# Altium PCB PCB1.PcbDoc
Units mm, origin at the board's own origin, x right, y up, seen from the top; angles counter-clockwise.
Board outline 45 x 45 mm, 2 copper layers (Top Layer, Bottom Layer); 38 components, 25 nets, 182 pads, 148 vias.
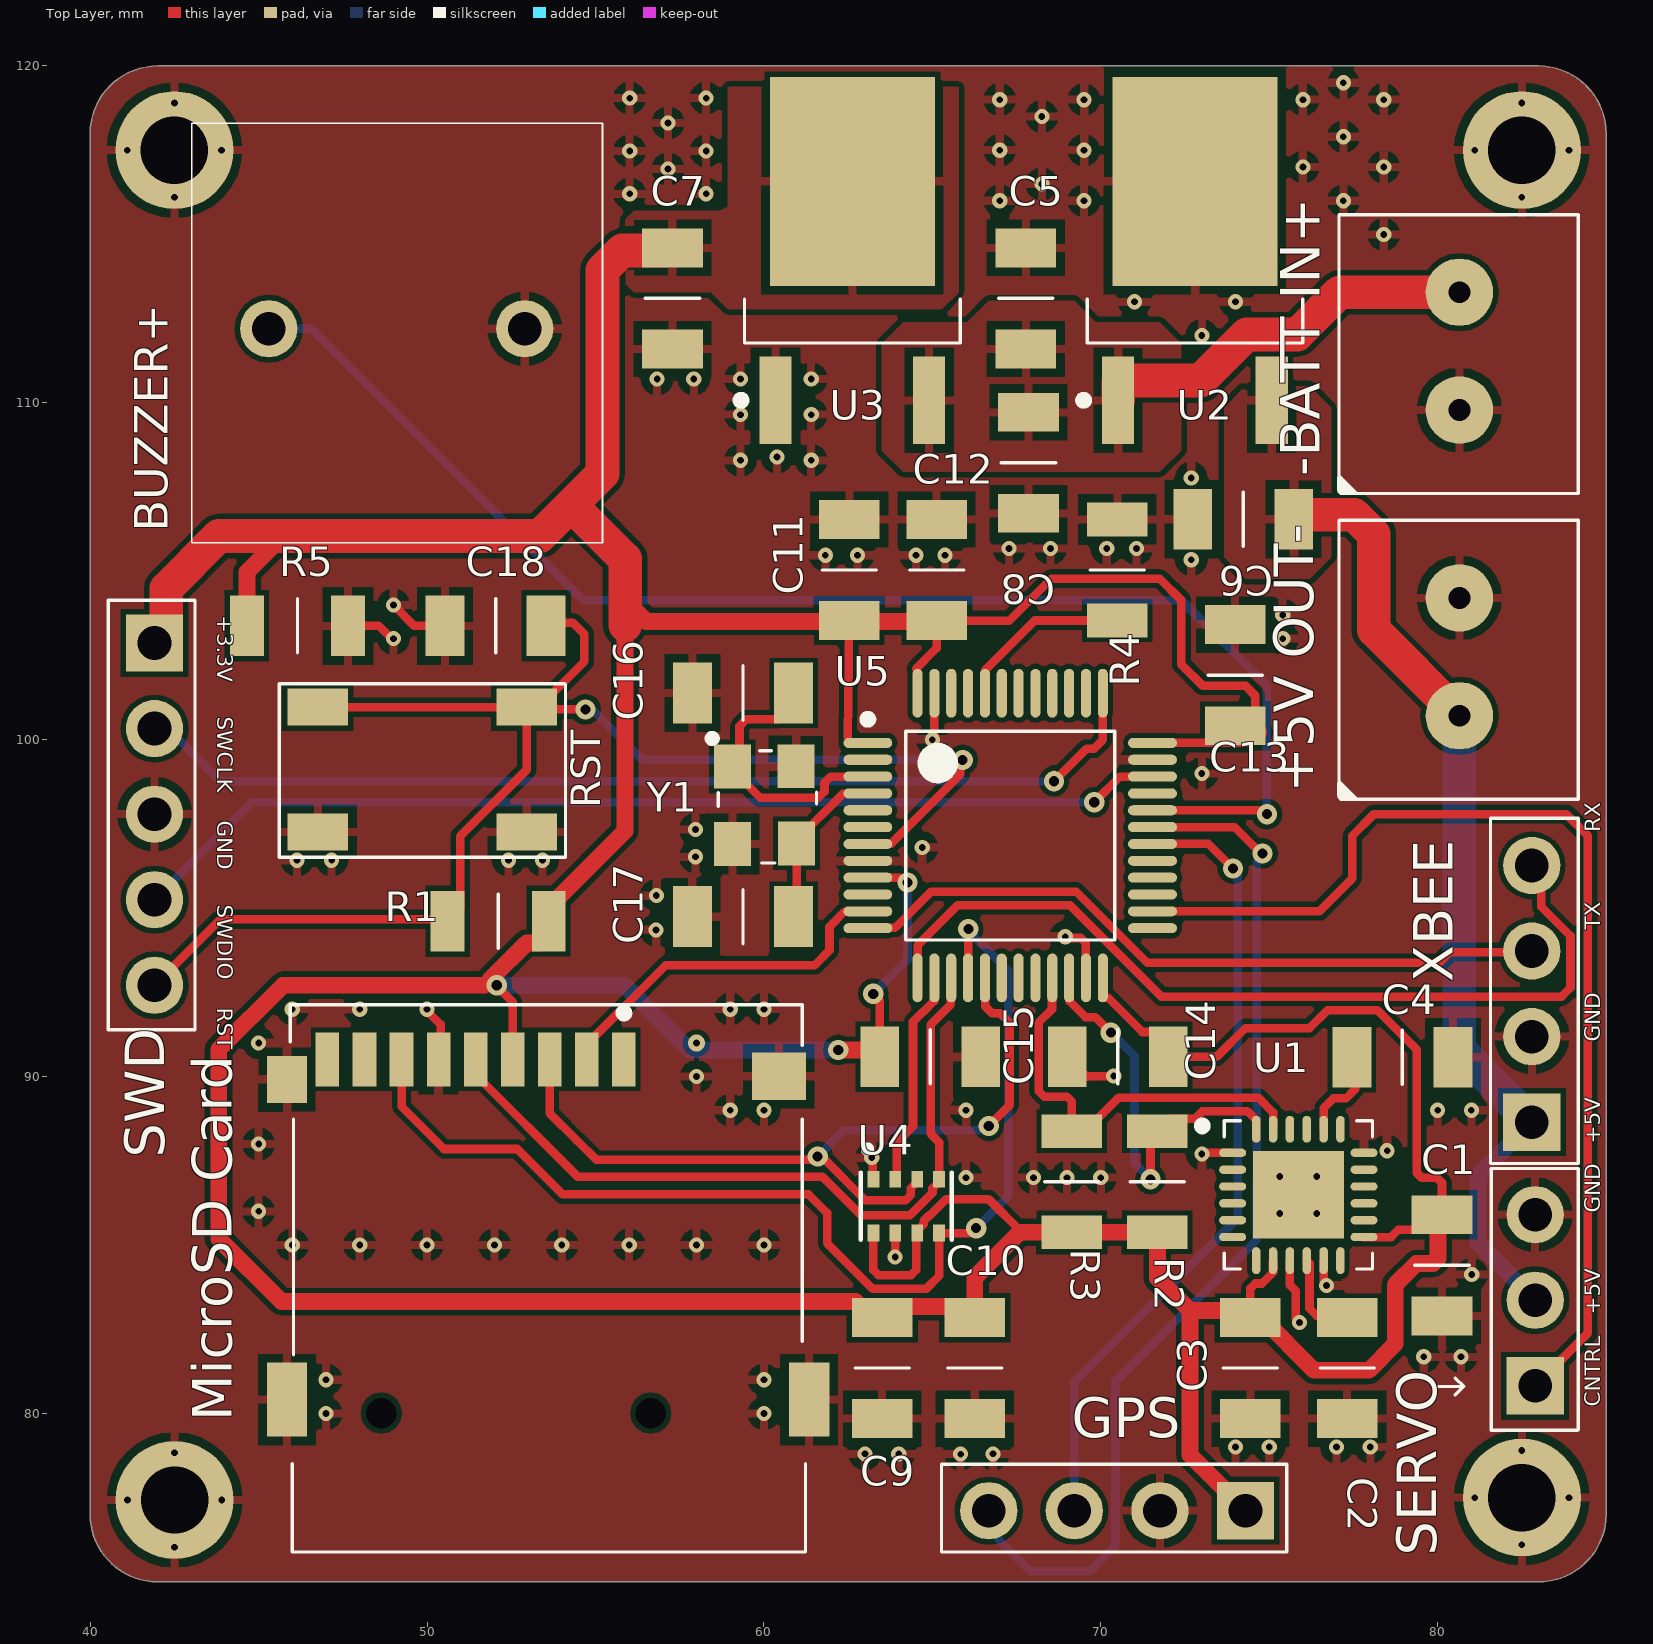
[diagram p0: Top Layer view]
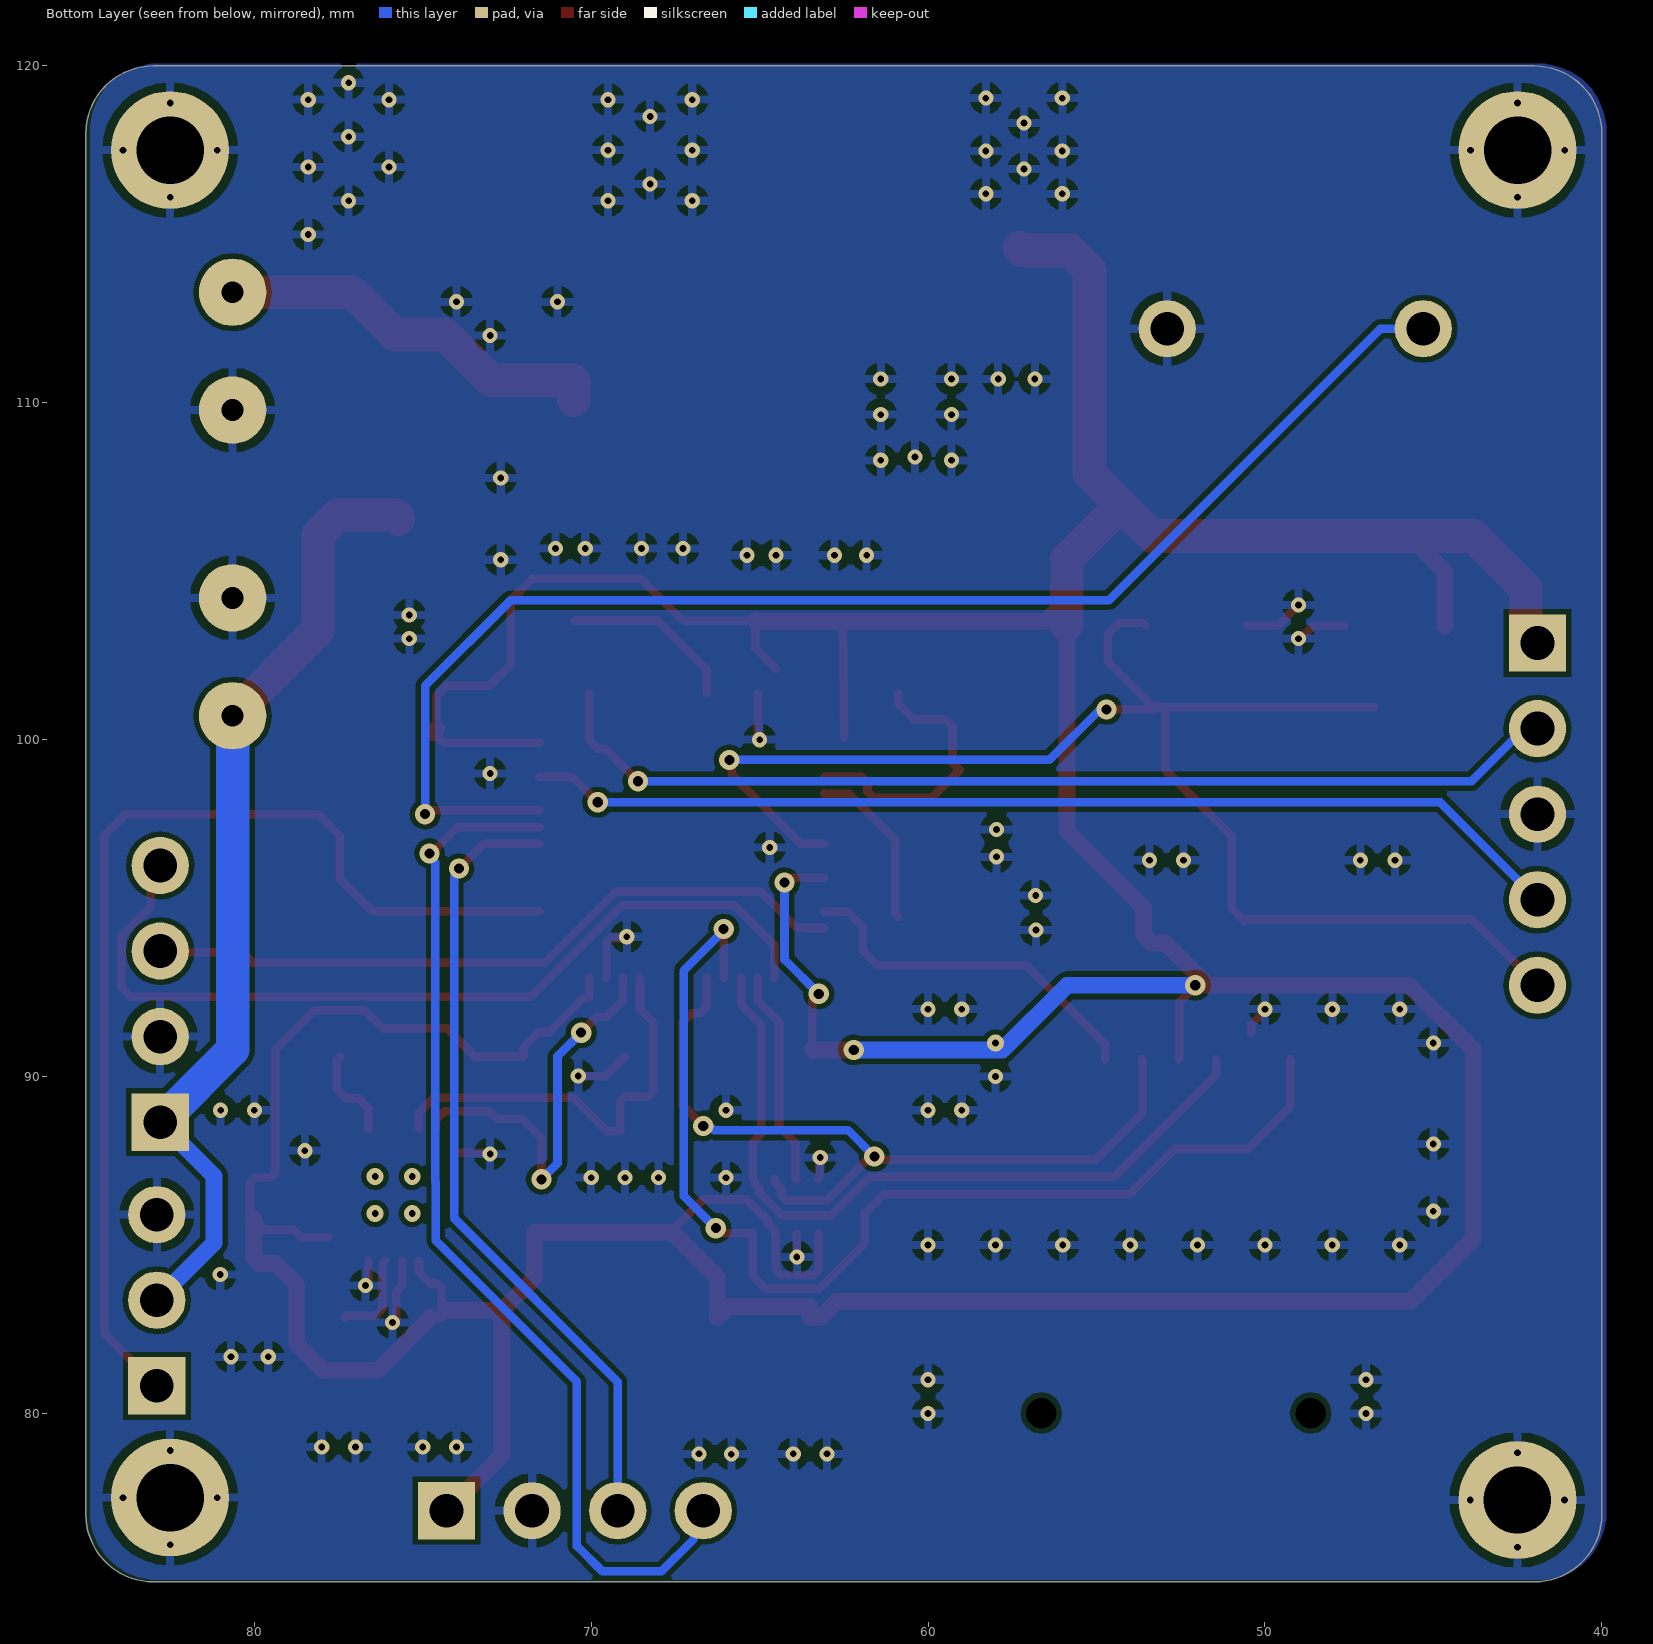
[diagram p1: Bottom Layer view, seen from below]
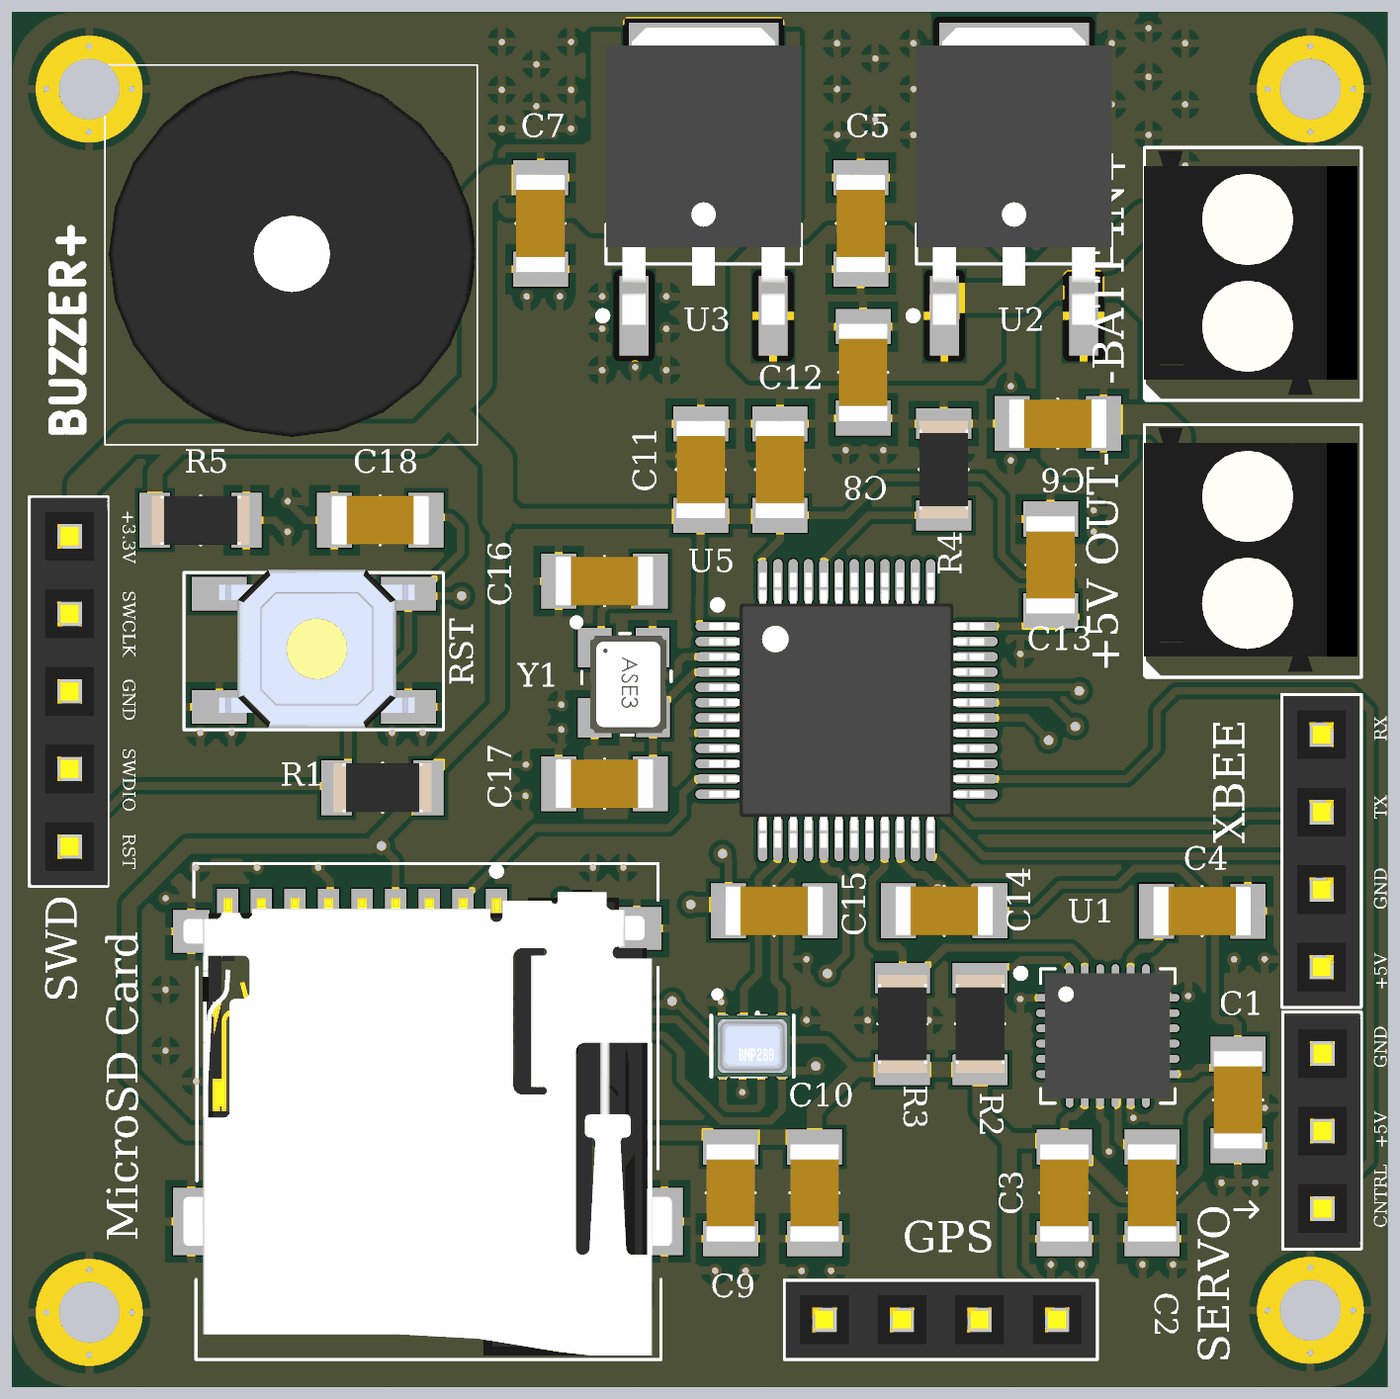
[diagram p2: 3D render of the assembled board from above, using the file's embedded part models]

## Layer stack, top to bottom
Top Solder: solder mask 0.0102, Solder Resist, Dk 3.5
Top Layer: signal copper 0.0356
Dielectric 1: dielectric 0.32, FR-4, Dk 4.8
Bottom Layer: signal copper 0.0356
Bottom Solder: solder mask 0.0102, Solder Resist, Dk 3.5

## Board outline
40,77 40,118 cw(c42,118) 42,120 83,120 cw(c83,118) 85,118 85,77 cw(c83,77) 83,75 42,75 cw(c42,77)

## Design rules (kind name [scope] priority, off if disabled: settings)
Clearance [All] p1: gap=0.152 ignorepadtopadclearanceinfootprint=FALSE except(0: Arc-Hole Track-Hole SMDPad-Hole THPad-Hole Via-Hole Fill-Hole Poly-Hole Region-Hole Text-Hole)
PolygonConnect [All] p1: connectstyle=Relief reliefconductorwidth=0.254 reliefentries=4 polygonreliefangle="90 Angle" airgapwidth=0.254
RoutingVias [All] p1: holewidth=0.3 width=0.6 viastyle="Through Hole" minholewidth=0.2 minwidth=0.45 maxholewidth=0.9 maxwidth=1.27
SolderMaskExpansion [All] p1: expansion=0.2 istentingtop=FALSE soldermaskfromhole=TRUE
Width [All] p1: maxlimit=1 minlimit=0.127 preferedwidth=0.254 minimp=50.000000 maximp=50.000000 favimp=50.000000
30 further rules are at their usual default settings.

## Components (designator, comment, footprint, x,y, rotation, side; value= is the part's Value field where it differs from the comment)
"+5V OUT-" "Klemens 1x2 3.5mm" "Klemens 1x2 - 3.5mm" 80.595,102.311 r90 top (schematic designator J1)
"-BATT IN+" "Klemens 1x2 3.5mm" "Klemens 1x2 - 3.5mm" 80.595,111.384 r90 top (schematic designator J2)
BUZZER+ "Buzzer 5v" BUZZER_5V 45.3,112.2 r0 top (schematic designator B1)
C1 "0.1 uF" C1206 79.629,83.82 r90 top
C2 "0.1 uF" C1206 77.814,81.922 r270 top
C3 "10 uF" C1206 73.942,80.772 r90 top
C4 "2.2 nF" C1206 78.379,91.074 r0 top
C5 "330 nF" C1206 67.275,112.525 r90 top
C6 "0.1 uF" C1206 74.803,106.045 r180 top
C7 "10 uF" C1206 57.785,113.675 r270 top
C8 "10 uF" C1206 68.353,108.795 r270 top
C9 "0.1 uF" C1206 63.011,80.772 r90 top
C10 "10 uF" C1206 65.759,80.772 r90 top
C11 "0.1 uF" C1206 62.034,104.462 r90 top
C12 "0.1 uF" C1206 64.626,104.462 r90 top
C13 "0.1 uF" C1206 73.49,101.342 r90 top
C14 "0.1 uF" C1206 71.081,90.086 r180 top
C15 "0.1 uF" C1206 64.361,91.086 r0 top
C16 "16 pF" C1206 58.805,101.885 r0 top
C17 "16 pF" C1206 58.805,95.25 r0 top
C18 "0.1 uF" C1206 51.459,103.878 r0 top
GPS "Header 2.54 1x4" "Header 2.54 1x4" 73.795,76.387 r180 top (schematic designator J3)
"MicroSD Card" "Micro SD Card Holder" "Micro SD Card Holder" 53.158,83.435 r0 top (schematic designator J5)
R1 "10K" "R1206 Resıstor" 52.034,94.615 r0 top
R2 "4.7K" "R1206 Resıstor" 71.681,86.956 r270 top
R3 "4.7K" "R1206 Resıstor" 69.141,86.956 r270 top
R4 "10K" "R1206 Resıstor" 70.49,105.114 r270 top
R5 "10K" "R1206 Resıstor" 46.228,103.378 r180 top
RST "Push Button" "PUSB BUTTON-SMD" 52.959,97.265 r180 top (schematic designator B2)
SERVO "Header 2.54 1x3" "Header 2.54 1x3" 82.87,80.821 r90 top (schematic designator J7)
SWD "Header 2.54 1x5" "Header 2.54 1x5" 41.91,102.87 r270 top (schematic designator J6)
U1 "MPU-6050" QFN50P400X400X90_HS-25N 75.864,86.486 r0 top
U2 "LM7805_DPAK" DPAK_3D 72.795,114.225 r90 top
U3 "LD108633_DPAK" DPAK_3D 62.625,114.225 r90 top
U4 "BMP280" BMP280 64.225,86.152 r90 top
U5 "STM32F101" LQFP48_stm32 67.31,97.155 r0 top
XBEE "Header 2.54 1x4" "Header 2.54 1x4" 82.07,89.146 r90 top (schematic designator J4)
Y1 "8 MHz 12.5 pf Osc" "8 MHZ Osc." 59.551,98.223 r270 top

## Footprints (in the part's own frame and the unit in brackets; to place one, negate y for a bottom-side part, rotate by r counter-clockwise, add the part's x,y. Pads: shape width x height; smd on the part's side, far side on the other; paste and mask are expansions set on the pad)
"8 MHZ Osc." [mm]
  rect 1.3x1.1 smd mask+0.05: 1(-0.981,-0.49) 2(1.319,-0.49) 3(1.303,1.417) 4(-0.986,1.401)
  silkscreen extent -1.91,-1.19 1.88,2.01, body extent -1.38,-0.64 1.82,1.86, height 1.22
BMP280 [mm]
  rect 0.5x0.35 smd mask+0.05: 1(0.8,0.975) 2(0.8,0.325) 3(0.8,-0.325) 4(0.8,-0.975) 5(-0.8,-0.975) 6(-0.8,-0.325) 7(-0.8,0.325) 8(-0.8,0.975)
  silkscreen extent -1,-1.35 1.79,1.35, body extent -1,-1.25 1,1.25, height 1
BUZZER_5V [mm]
  round 1.7 hole 1: 1(0,0) 2(7.6,0)
  silkscreen extent -2.29,-6.35 9.91,6.1, body extent -2.16,-6.1 9.84,5.9, height 9
C1206 [mm]
  rect 1.15x1.8 smd mask+0.05: 1(-0.925,-0.5) 2(2.075,-0.5)
  silkscreen extent 0.58,-1.3 0.58,0.31, body extent -1.02,-1.3 2.18,0.3, height 1
DPAK_3D [mm]
  rect 2.6x0.95 smd: 1(-4.15,2.28) 3(-4.15,-2.28)
  rect 6.2x4.9 smd: 2(2.35,0)
  silkscreen extent -4.27,-3.2 -1.15,3.43, body extent -4.44,-3.2 5.29,3.2, height 3.3
"Header 2.54 1x3" [mm]
  rect 1.7x1.7 hole 1 mask+0.05: 1(0,-0.025)
  round 1.7 hole 1 mask+0.05: 2(2.54,-0.025) 3(5.08,-0.025)
  silkscreen extent -1.33,-1.3 6.45,1.28, body extent -1.26,-1.27 6.36,1.23, height 9.1
"Header 2.54 1x4" [mm]
  rect 1.7x1.7 hole 1 mask+0.05: 1(-0.5,-0.725)
  round 1.7 hole 1 mask+0.05: 2(2.04,-0.725) 3(4.58,-0.725) 4(7.12,-0.725)
  silkscreen extent -1.73,-2.1 8.52,0.5, body extent -1.68,-2.05 8.48,0.45, height 9.1
"Header 2.54 1x5" [mm]
  rect 1.7x1.7 hole 1 mask+0.05: 1(0,0)
  round 1.7 hole 1 mask+0.05: 2(2.54,0) 3(5.08,0) 4(7.62,0) 5(10.16,0)
  silkscreen extent -1.28,-1.37 11.48,1.2, body extent -1.25,-1.3 11.45,1.2, height 9.1
"Klemens 1x2 - 3.5mm" [mm]
  round 2 hole 0.65 mask+0: 1(-1.6,-0.05) 2(1.9,-0.05)
  silkscreen extent -4.11,-3.58 4.2,3.58, body extent -3.9,-3.45 4.09,3.55, height 8.9
LQFP48_stm32 [mm] "TSQFP, 48-Leads, Body 7,00x7,00mm, Pitch 0,50mm, IPC Medium Density"
  oval 1.45x0.3 smd mask+0.05: 1(-4.225,2.75) 2(-4.225,2.25) 3(-4.225,1.75) 4(-4.225,1.25) 5(-4.225,0.75) 6(-4.225,0.25) 7(-4.225,-0.25) 8(-4.225,-0.75) 9(-4.225,-1.25) 10(-4.225,-1.75) 11(-4.225,-2.25) 12(-4.225,-2.75) 25(4.225,-2.75) 26(4.225,-2.25) 27(4.225,-1.75) 28(4.225,-1.25) 29(4.225,-0.75) 30(4.225,-0.25) 31(4.225,0.25) 32(4.225,0.75) 33(4.225,1.25) 34(4.225,1.75) 35(4.225,2.25) 36(4.225,2.75)
  oval 0.3x1.45 smd mask+0.05: 13(-2.75,-4.225) 14(-2.25,-4.225) 15(-1.75,-4.225) 16(-1.25,-4.225) 17(-0.75,-4.225) 18(-0.25,-4.225) 19(0.25,-4.225) 20(0.75,-4.225) 21(1.25,-4.225) 22(1.75,-4.225) 23(2.25,-4.225) 24(2.75,-4.225) 37(2.75,4.225) 38(2.25,4.225) 39(1.75,4.225) 40(1.25,4.225) 41(0.75,4.225) 42(0.25,4.225) 43(-0.25,4.225) 44(-0.75,4.225) 45(-1.25,4.225) 46(-1.75,4.225) 47(-2.25,4.225) 48(-2.75,4.225)
  silkscreen extent -4.35,-3.1 3.1,3.57, body extent -4.5,-4.5 4.5,4.5, height 1.6
"Micro SD Card Holder" [mm]
  rect 0.7x1.6 smd paste+0 mask+0.05: 1(2.684,7.075) 2(1.584,7.075) 3(0.484,7.075) 4(-0.616,7.075) 5(-1.716,7.075) 6(-2.816,7.075) 7(-3.916,7.075) 8(-5.016,7.075) Cd(-6.116,7.075)
  rect 1.2x1.4 smd paste+0 mask+0.05: 10(-7.316,6.475)
  rect 1.6x1.4 smd paste+0 mask+0.05: 11(7.284,6.575)
  rect 1.2x2.2 smd paste+0 mask+0.05: 12(-7.316,-3.025) 13(8.184,-3.025)
  round 0 hole 0.9 unplated paste-1000 mask+0: ""(-4.516,-3.425) ""(3.484,-3.425)
  silkscreen extent -7.22,-7.55 8.08,8.7, body extent -7.57,-7.42 8.43,7.83, height 1.85
"PUSB BUTTON-SMD" [mm]
  rect 1.8x1.1 smd mask+0.05: 1(0,0) 2(6.2,0) 3(0,-3.7) 4(6.2,-3.7)
  silkscreen extent -1.15,-4.4 7.35,0.75, body extent -0.2,-4.5 6.2,0.7, height 1.5
QFN50P400X400X90_HS-25N [mm] "QFN, 24-Leads, Body 4,00x4,00mm, Pitch 0,50mm, Thermal Pad 2,70x2,60mm, IPC Medium Density"
  oval 0.8x0.25 smd mask+0.05: 1(-1.95,1.25) 2(-1.95,0.75) 3(-1.95,0.25) 4(-1.95,-0.25) 5(-1.95,-0.75) 6(-1.95,-1.25) 13(1.95,-1.25) 14(1.95,-0.75) 15(1.95,-0.25) 16(1.95,0.25) 17(1.95,0.75) 18(1.95,1.25)
  oval 0.25x0.8 smd mask+0.05: 7(-1.25,-1.95) 8(-0.75,-1.95) 9(-0.25,-1.95) 10(0.25,-1.95) 11(0.75,-1.95) 12(1.25,-1.95) 19(1.25,1.95) 20(0.75,1.95) 21(0.25,1.95) 22(-0.25,1.95) 23(-0.75,1.95) 24(-1.25,1.95)
  rect 2.7x2.6 smd: 25(0,0)
  silkscreen extent -2.97,-2.2 2.2,2.2, body extent -2.05,-2.05 2.05,2.05, height 0.9
"R1206 Resıstor" [mm]
  rect 1x1.8 smd mask+0.05: 1(-1.425,0) 2(1.575,0)
  silkscreen extent 0.08,-0.8 0.08,0.81, body extent -1.52,-0.8 1.68,0.81, height 0.55

## Part data
C1 C2 C6 C9 C11 C12 C13 C14 C15 C18: library part "0.1 uF C1206", "0.1 uF C1206"
C4: library part "2.2 nF c1206", "2.2 nF c1206"
C5: library part "330 nF C1206", "330 nF C1206"
R1 R4 R5: library part "10K R1206", "10K R1206"
R2 R3: library part "4.7K R1206", "4.7K R1206"
RST: "Smd Push Button", Satın Alma Linki=https://urun.n11.com/diger/mini-pushbutton-switch-smd-P227461537?gclid=Cj0KCQjwkoDmBRCcARIsAG3xzl8Y_-jeD7HocNM6lvuZ_rVp83568XPGtNzlPwXWLph8oCRqo0yh87UaApZYEALw_wcB&gclsrc=aw.ds

## Free pads (board coordinates)
  round 3.5 hole 2 mask+0: 3(82.5,117.5) m.2(42.5,117.5) m.2(42.505,77.43) m.2(82.5,77.5)

## Via types
v1: diameter 0.45, hole 0.2, Top Layer to Bottom Layer, 126 vias
v2: diameter 0.6, hole 0.3, Top Layer to Bottom Layer, 17 vias
v3: diameter 0.5, hole 0.2, Top Layer to Bottom Layer, 5 vias

## Nets (pads, with @x,y where several pads share a name; then routed paths per layer and width w, separated by ;. In a path a pad name is that pad's centre, name@x,y a point inside that pad or via, vN(x,y) a via of type N, cw(c..) or ccw(c..) an arc to the next point about the centre after c; other vN are vias at no path point)
+3.3V: "MicroSD Card.4" C1.2 C3.2 C7.1 C9.2 C10.2 C11.1 C12.1 C13.1 C14.1 C15.1 GPS.1 R1.2 R2.2 R3.2 R5.2 SWD.1 U1.8 U1.13 U3.2 U4.6 U4.8 U5.1 U5.9 U5.24 U5.36 U5.48 | length 192.7
  Top Layer w0.254: v2@52.07,92.683 52.542,92.211 52.542,90.51 ; 62.484,100.076 C11.1@62.534,103.505 ; U5.9 63.094,95.896 64.03,95.896 64.168,95.758 v2(64.262,95.758) ; v2(63.246,92.456) 63.436,92.266 C15.1@63.436,90.805 ; U4.8 63.25,84.256 63.399,84.107 64.367,84.107 64.516,84.256 64.516,85.318 U4.6 64.55,85.427 64.746,85.623 64.746,85.717 64.909,85.881 64.93,85.881 65.407,86.358 66.673,86.358 67.601,85.43 67.601,85.381 ; 64.516,102.108 65.126,102.718 C12.1 67.288,103.537 68.525,104.775 71.755,104.775 72.39,104.14 72.39,102.235 73.025,101.6 74.295,101.6 74.588,101.307 C13.1@74.588,100.319 ; U5.24 70.06,92.367 70.081,92.346 70.214,92.346 71.237,91.323 71.558,91.323 72.006,90.875 C14.1 73.441,90.586 74.295,91.44 76.2,91.44 76.729,91.969 78.211,91.969 79.379,90.801 79.379,87.144 79.528,86.995 79.98,86.995 80.129,86.846 C1.2 80.01,85.776 79.681,85.447 78.827,85.447 78.616,85.236 U1.13 ; U5.36 74.378,99.905 C13.1@74.69,100.217 ; C3.2@74.239,83.058 74.442,82.856 74.442,83.709 74.591,83.857 74.781,83.857 75.112,84.188 75.112,84.534 U1.8 ; C3.2 C3.2@74.767,82.847
  Top Layer w0.5: R5.2 44.653,104.978 45.72,106.045 ; 51.704,92.71 45.72,92.71 43.815,90.805 43.815,85.185 45.682,83.318 62.715,83.318 63.186,82.847 C9.2 ; v2@51.887,92.893 52.959,93.965 53.359,93.965 53.609,94.215 53.609,95.015 55.88,97.286 55.88,103.4 ; v2@52.07,92.683 v2(52.07,92.71) ; 55.88,104.14 56.515,103.505 62.534,103.505 65.094,103.505 C12.1 ; v2(62.206,90.791) 63.423,90.791 C15.1@63.436,90.805 ; C9.2@63.511,83.172 65.934,83.172 C10.2 66.259,84.039 67.601,85.381 R3.2 R2.2 71.681,84.021 72.644,83.058 ; C3.2@74.239,83.058 72.644,83.058 ; GPS.1 72.644,78.763 72.644,83.058 ; C13.1@74.588,100.319 C13.1@74.69,100.217 ; C3.2@74.767,82.847 76.334,81.28 77.956,81.28 78.74,82.064 78.74,83.82 79.375,84.455 79.861,84.455 80.01,84.604 C1.2@80.01,85.776
  Top Layer w1: SWD.1 42.26,103.22 42.26,104.49 43.815,106.045 45.72,106.045 53.351,106.045 54.279,106.973 ; 55.88,103.4 55.88,104.14 55.88,105.371 54.279,106.972 ; C7.1 57.21,114.525 55.792,114.525 55.206,113.939 55.206,107.9 54.279,106.973
  Bottom Layer w0.254: v2(63.246,92.456) 64.262,93.472 v2(64.262,95.758)
  Bottom Layer w0.5: v2(52.07,92.71) 55.88,92.71 57.799,90.791 v2(62.206,90.791)
  other v3: 58,91
+5: "+5V OUT-.1" C6.1 SERVO.2 U2.3 XBEE.1 | length 28.8
  Top Layer w1: C6.1 75.728,106.605 75.803,106.68 77.519,106.68 78.105,106.094 78.105,103.251 80.645,100.711
  Bottom Layer w0.5: XBEE.1 82.7,88.551 81.2,87.051 81.2,85.056 SERVO.2
  Bottom Layer w1: 80.645,100.711 80.645,90.796 82.7,88.741 XBEE.1@82.7,88.551
GND: "+5V OUT-.2" "-BATT IN+.1" "MicroSD Card.6" "MicroSD Card.10" "MicroSD Card.11" "MicroSD Card.12" "MicroSD Card.13" BUZZER+.2 C1.1 C2.2 C3.1 C4.2 C5.2 C6.2 C7.2 C8.2 C9.1 C10.1 C11.2 C12.2 C13.2 C14.2 C15.2 C16.1 C17.1 C18.1 GPS.2 pad.3 pad.m.2 R4.1 R5.1 RST.1 RST.2 SERVO.3 SWD.3 U1.1 U1.9 U1.11 U1.18 U2.2 U3.1 U4.1 U4.7 U5.8 U5.23 U5.35 U5.47 XBEE.2 Y1.2 Y1.4 | length 14
  Top Layer w0.254: R5.1 48.569,103.378 48.947,103 v1(49,103) ; v1(49,104) 49.622,103.378 C18.1 ; v1(50,92) 50,91.947 50.4,91.547 50.4,91.3 ; v1(63.2,87.6) 63.225,87.575 63.225,86.977 U4.1 ; v1(63.896,84.644) 63.898,84.646 63.898,85.35 U4.7 ; v1(65,100) 65,100.053 65.06,100.113 U5.47 ; v1(68.944,94.151) 68.981,94.114 69.411,94.114 69.56,93.965 U5.23 ; C14.2 69.592,90 69.608,90.016 v1(70.384,90.016) ; v1(73,87.7) 73.034,87.734 73.912,87.734 U1.1 ; U1.9 75.612,84.534 75.612,83.812 75.79,83.634 75.79,82.81 v1(75.9,82.7) ; U1.11 76.616,84.534 76.616,83.937 76.7,83.853 v1(76.7,83.8)
  other v1: 42.505,76.03 82.5,76.1 41.105,77.43 43.905,77.43 81.1,77.5 83.9,77.5 63,78.8 64,78.8 65.839,78.791 66.8,78.8 42.505,78.83 82.5,78.9 74,79 75,79 77,79 78,79 47,80 60,80 47,81 60,81 79.588,81.681 80.695,81.681 81.012,84.127 46,85 48,85 50,85 52,85 54,85 56,85 58,85 60,85 45,86 66,87 68,87 69,87 70,87 78.5,87.8 45,88 59,89 60,89 66,89 80,89 81,89 58,90 45,91 46,92 48,92 59,92 60,92 56.794,94.352 56.806,95.376 46.139,96.421 47.167,96.421 52.416,96.421 53.425,96.421 57.966,96.523 64.7,96.8 57.966,97.337 73,99 75.4,103 75.4,103.7 72.685,105.342 61.823,105.475 62.781,105.475 64.517,105.475 65.379,105.475 67.276,105.675 68.51,105.675 70.177,105.675 71.057,105.675 72.685,107.771 59.304,108.294 61.404,108.294 60.384,108.394 59.304,109.65 61.404,109.65 56.83,110.707 57.918,110.707 59.304,110.707 61.404,110.707 73,112 71,113 74,113 78.4,115 67,116 69.5,116 77.2,116 42.5,116.1 82.5,116.1 56.015,116.205 58.285,116.205 68.25,116.5 57.15,116.94 76,117 78.4,117 56.015,117.475 58.285,117.475 41.1,117.5 43.9,117.5 67,117.5 69.5,117.5 81.1,117.5 83.9,117.5 77.2,117.9 57.15,118.31 68.25,118.5 42.5,118.9 82.5,118.9 67,119 69.5,119 76,119 78.4,119 56.015,119.045 58.285,119.045 77.2,119.5
NetB1_1: BUZZER+.1 U5.32 | length 41.3
  Top Layer w0.254: U5.32 74.721,97.905 74.836,97.79 v2(74.93,97.79)
  Bottom Layer w0.254: BUZZER+.1 46.57,112.2 54.63,104.14 72.39,104.14 74.93,101.6 v2(74.93,97.79)
NetC2_1: C2.1 U1.10 | length 2.7
  Top Layer w0.254: U1.10 76.196,84.454 76.196,83.117 76.404,82.909 76.404,82.9 77.261,82.9 C2.1
NetC4_1: C4.1 U1.20 | length 2.8
  Top Layer w0.254: U1.20 76.616,88.438 76.616,89.066 76.9,89.35 77.275,89.35 77.55,89.625 77.55,90.478 C4.1
NetC16_2: C16.2 U5.3 Y1.1 | length 8.4
  Top Layer w0.254: C16.2 60.88,101.06 60.432,100.612 59.487,100.612 59.275,100.4 59.275,99.319 59.061,99.104 59.885,98.28 61.617,98.28 61.798,98.461 61.798,98.724 61.979,98.905 U5.3
NetC17_2: C17.2 U5.4 Y1.3 | length 5
  Top Layer w0.254: C17.2 60.968,94.838 Y1.3 60.968,97.02 62.344,98.396 63.076,98.396 U5.4
NetJ3_3: GPS.3 U5.30 | length 23.8
  Top Layer w0.254: GPS.3@69.2,77.127 GPS.3 ; U5.30 73.194,96.905 v2(73.925,96.174)
  Bottom Layer w0.254: GPS.3 69.215,80.94 74.068,85.793 74.068,95.938 73.925,96.081 v2(73.925,96.174)
NetJ3_4: GPS.4 U5.31 | length 31.1
  Top Layer w0.254: U5.31 73.972,97.405 74.752,96.625 v2(74.8,96.625)
  Bottom Layer w0.254: GPS.4 66.952,76.836 66.952,76.275 67.912,75.314 69.675,75.314 70.425,76.064 70.425,80.939 74.61,85.124 74.61,86.87 74.625,86.885 74.625,96.356 74.8,96.531 v2(74.8,96.625)
NetJ4_3: U5.12 XBEE.3 | length 21.9
  Top Layer w0.254: U5.12@63.672,94.405 U5.12 63.094,94.414 63.889,94.414 64.967,95.492 69.266,95.492 71.383,93.375 80.048,93.375 80.369,93.696 82.765,93.696 XBEE.3 XBEE.3@82.62,93.726
NetJ4_4: U5.13 XBEE.4 | length 26.2
  Top Layer w0.254: U5.13 64.56,93.897 65.75,95.086 69.085,95.086 71.797,92.375 83.677,92.375 83.944,92.642 83.944,94.174 83.072,95.046 83.072,95.989 XBEE.4
NetJ5_2: "MicroSD Card.2" U5.11 | length 10.8
  Top Layer w0.254: 54.742,90.51 54.742,90.96 57.082,93.3 61.5,93.3 61.947,93.747 61.947,94.449 62.395,94.896 63.076,94.896 U5.11
NetJ5_3: "MicroSD Card.3" U4.3 U5.17 | length 24.3
  Top Layer w0.254: 53.642,90.51 53.642,88.908 54.45,88.1 54.454,88.1 55.026,87.528 v2@61.595,87.528 ; v2@61.811,87.528 63.014,86.325 64.205,86.325 64.354,86.474 64.354,86.681 64.55,86.877 U4.3 ; U5.17 66.569,92.921 66.569,92.081 66.775,91.875 67.017,91.875 67.29,91.601 67.29,89.148 v2(66.675,88.533)
  Bottom Layer w0.254: v2(61.595,87.63) 62.365,88.4 66.353,88.4 66.42,88.466 66.609,88.466 v2(66.675,88.533)
NetJ5_5: "MicroSD Card.5" U4.4 U5.15 | length 22.8
  Top Layer w0.254: 51.442,90.51 51.442,90.06 54.473,87.029 61.736,87.029 62.884,85.881 64.335,85.881 65.004,86.55 65.004,86.681 65.152,86.829 65.152,86.904 U4.4 65.2,88.05 64.95,88.3 64.95,88.525 64.95,91.543 65.551,92.145 65.551,92.921 U5.15
NetJ5_7: "MicroSD Card.7" U4.5 U5.16 | length 33.9
  Top Layer w0.254: 49.242,90.51 49.242,89.108 50.5,87.85 52.675,87.85 54.025,86.5 61.325,86.5 61.875,85.95 61.875,85.05 63.224,83.701 64.82,83.701 65.2,84.081 U4.5 66.058,85.352 66.206,85.5 v2(66.3,85.5) ; U5.16 66.064,92.934 66.064,94.376 v2(66.067,94.379)
  Bottom Layer w0.254: v2(66.067,94.379) 66.067,94.333 67.254,93.146 67.254,86.454 v2(66.3,85.5)
NetJ6_2: SWD.2 U5.37 | length 30.9
  Top Layer w0.254: v2@68.611,98.965 v2(68.611,98.768) 69.578,99.734 69.799,99.734 70.06,99.995 U5.37
  Bottom Layer w0.254: SWD.2 42.301,100.33 43.863,98.768 v2(68.611,98.768)
NetJ6_4: SWD.4 U5.34 | length 31.1
  Top Layer w0.254: v2(69.805,98.143) 70.559,98.896 71.526,98.896 U5.34
  Bottom Layer w0.254: SWD.4 44.803,98.143 v2(69.805,98.143)
NetJ7_1: SERVO.1 U5.26 | length 32.1
  Top Layer w0.254: U5.26 76.49,94.905 77.47,95.885 77.47,97.155 78.105,97.79 83.82,97.79 84.455,97.155 84.455,82.381 SERVO.1
NetR2_1: R2.1 U1.24 U5.22 | length 12.2
  Top Layer w0.254: U5.22 69.069,92.921 69.069,92.24 69.543,91.765 69.836,91.765 v2(70.298,91.303) ; v2(71.475,86.95) 71.475,88.174 R2.1 72.054,88.754 72.804,88.754 73.019,88.969 74.352,88.969 74.614,88.707 U1.24
  Bottom Layer w0.254: v2(70.298,91.303) 71,90.601 71,87.425 v2(71.475,86.95)
NetR3_1: R3.1 U1.23 U5.21 | length 12.6
  Top Layer w0.254: U5.21 68.551,92.921 68.551,92 68.152,91.601 68.152,89.57 68.316,89.407 68.992,89.407 69.141,89.258 R3.1 69.541,88.381 70.536,89.375 74.675,89.375 75.114,88.936 U1.23
NetR4_2: R4.2 U5.44 | length 5.2
  Top Layer w0.254: U5.44 66.569,101.389 66.569,102.07 68.037,103.539 R4.2
NetU4_2: U4.2 U5.14 | length 6.5
  Top Layer w0.254: U4.2 63.948,87 63.948,88.042 64.425,88.519 64.425,91.625 64.726,91.926 64.738,91.926 65.051,92.24 65.051,92.921 U5.14
NRST: C18.2 R1.1 RST.3 RST.4 SWD.5 U5.7 | length 44.9
  Top Layer w0.254: SWD.5 43.875,94.675 50.549,94.675 R1.1 50.982,94.988 50.982,97.133 52.959,99.11 RST.3 ; RST.4 RST.3 ; RST.3@53.2,101 RST.3@53.235,100.965 ; C18.2 53.631,103.475 54.325,103.475 54.669,103.131 54.669,102.325 53.309,100.965 RST.3@53.235,100.965 ; v2(54.7,100.9) 53.3,100.9 RST.3@53.235,100.965 ; U5.7 63.094,96.914 63.775,96.914 65.834,98.972 65.834,99.334 v2(65.9,99.4) ; RST.3 RST.3@53.235,100.965
  Bottom Layer w0.254: v2(54.7,100.9) 54.9,100.9 56.4,99.4 v2(65.9,99.4)
Vin: "-BATT IN+.2" C5.1 C8.1 U2.1 U3.3 | length 11.8
  Top Layer w1: U2.1 70.515,110.636 70.54,110.661 72.964,110.661 74.33,112.027 75.832,112.027 77.089,113.284 80.645,113.284
pads on no net: "MicroSD Card.1" "MicroSD Card.8" "MicroSD Card." "MicroSD Card.Cd" U1.2 U1.3 U1.4 U1.5 U1.6 U1.7 U1.12 U1.14 U1.15 U1.16 U1.17 U1.19 U1.21 U1.22 U1.25 U5.2 U5.5 U5.6 U5.10 U5.18 U5.19 U5.20 U5.25 U5.27 U5.28 U5.29 U5.33 U5.38 U5.39 U5.40 U5.41 U5.42 U5.43 U5.45 U5.46
copper on no net:
  other v3: 75.314,85.936 76.414,85.936 75.314,87.036 76.414,87.036

## Polygon pours and split planes (outlines as drawn)
GND on Top Layer "GND_L01_P009" (solid, pour order 9): 83,120 cw(c83,118) 85,118 85,77 cw(c83,77) 83,75 42,75 cw(c42,77) 40,77 40,118 cw(c42,118) 42,120
+3.3V on Top Layer "+3.3V_L01_P002" (solid, pour order 2): 58.928,112.776 58.42,113.284 56.134,113.284 55.88,113.538 55.88,115.443 56.134,115.697 58.166,115.697 58.674,115.697 58.928,115.824 58.928,116.078 58.928,119.38 65.786,119.38 65.786,113.284 65.278,112.776
Vin on Top Layer "VIN_L01_P000" (solid, pour order 0): 64.135,107.95 71.755,107.95 72.39,108.585 72.39,111.76 71.755,112.395 69.85,112.395 69.215,113.03 66.675,113.03 66.04,112.395 64.135,112.395 63.5,111.76 63.5,108.585
+5 on Top Layer "+5_L01_P005" (solid, pour order 5): 73.66,105.41 74.295,104.775 76.2,104.775 76.835,105.41 76.835,109.855 76.2,110.49 74.295,110.49 73.66,109.855
GND on Bottom Layer "GND_L02_P010" (solid, pour order 10): 82.873,120.061 cw(c82.873,118.061) 84.873,118.061 84.873,77.061 cw(c82.873,77.061) 82.873,75.061 41.873,75.061 cw(c41.873,77.061) 39.873,77.061 39.873,118.061 cw(c41.873,118.061) 41.873,120.061

## Silkscreen, mask and mechanical layers (free items; w line width, h text height)
Top Overlay:
  lines w0.1: 80.025,80.8 80.775,80.8 ; 80.525,80.55 80.775,80.8 ; 80.775,80.8 80.525,81.05 80.775,80.8
  text "+3.3V     SWCLK    GND     SWDIO    RST" at 43.605,103.7 h0.8 r270
  text "+5V        GND         TX          RX" at 84.995,88 h0.8 r90
  text "CNTRL   +5V        GND" at 84.995,80.2 h0.8 r90
Mechanical 1:
  the board outline again, w0.1